# Altium PCB LacewingPXE_v3p1.PcbDoc (part 1 of 2)
Units mm, origin at the board's own origin, x right, y up, seen from the top; angles counter-clockwise.
Board outline 62.74 x 108.59 mm, 2 copper layers (Top Layer, Bottom Layer); 114 components, 91 nets, 535 pads, 84 vias.
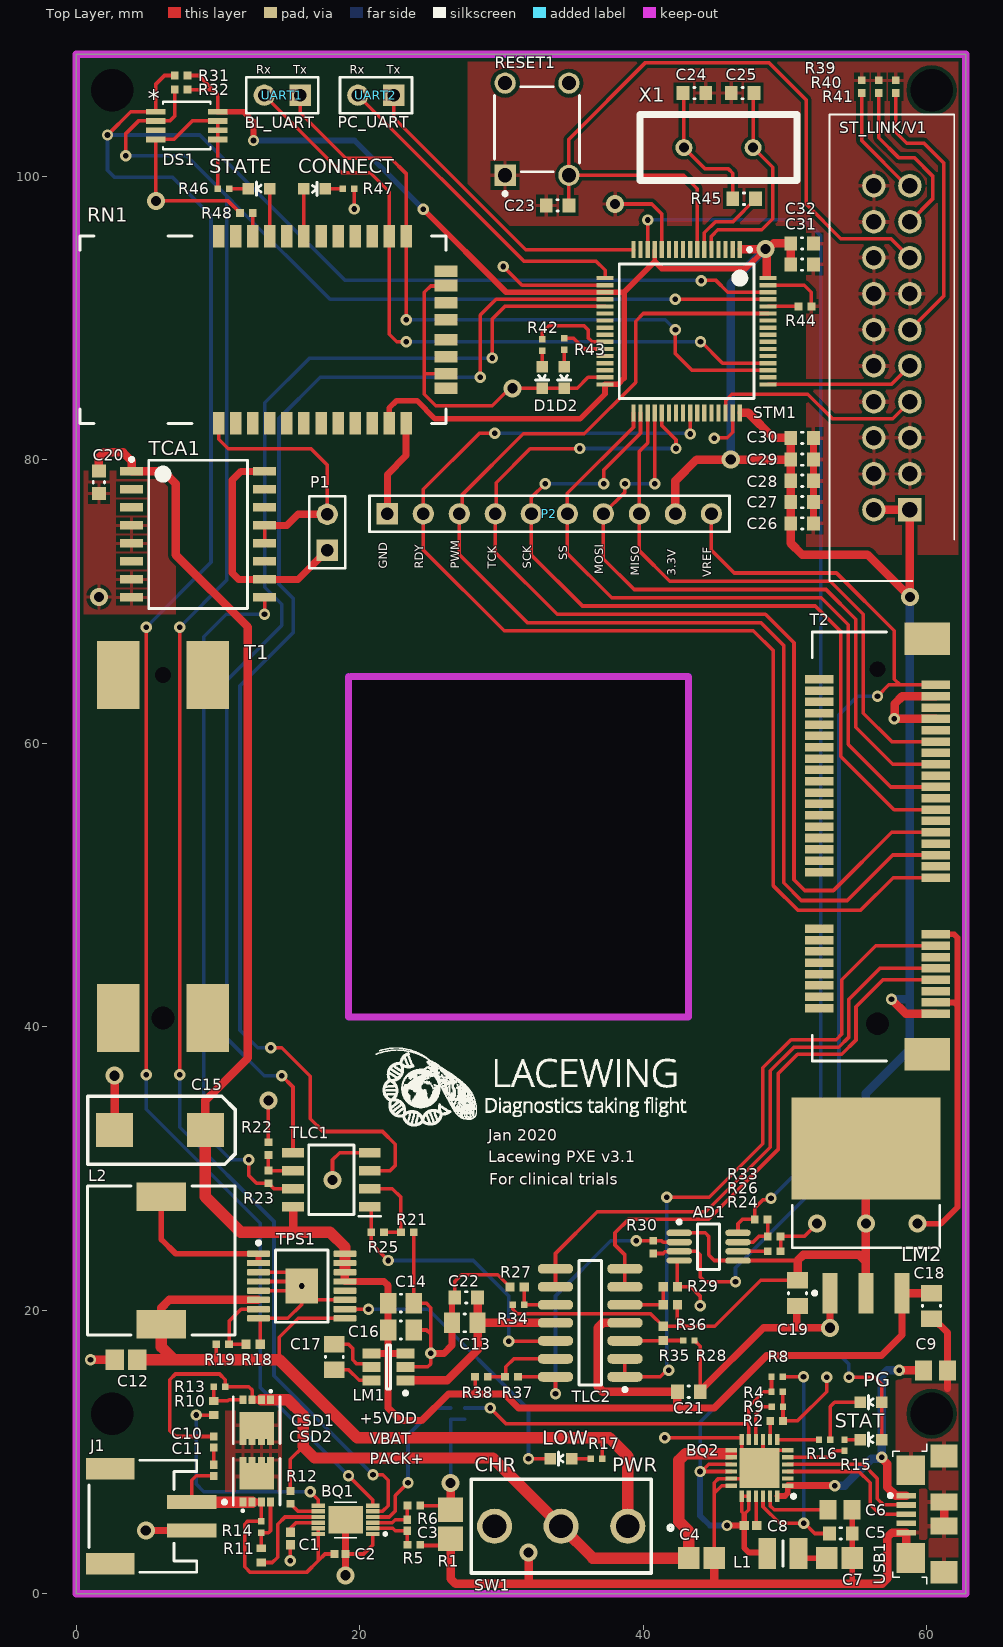
[diagram p0: Top Layer view]
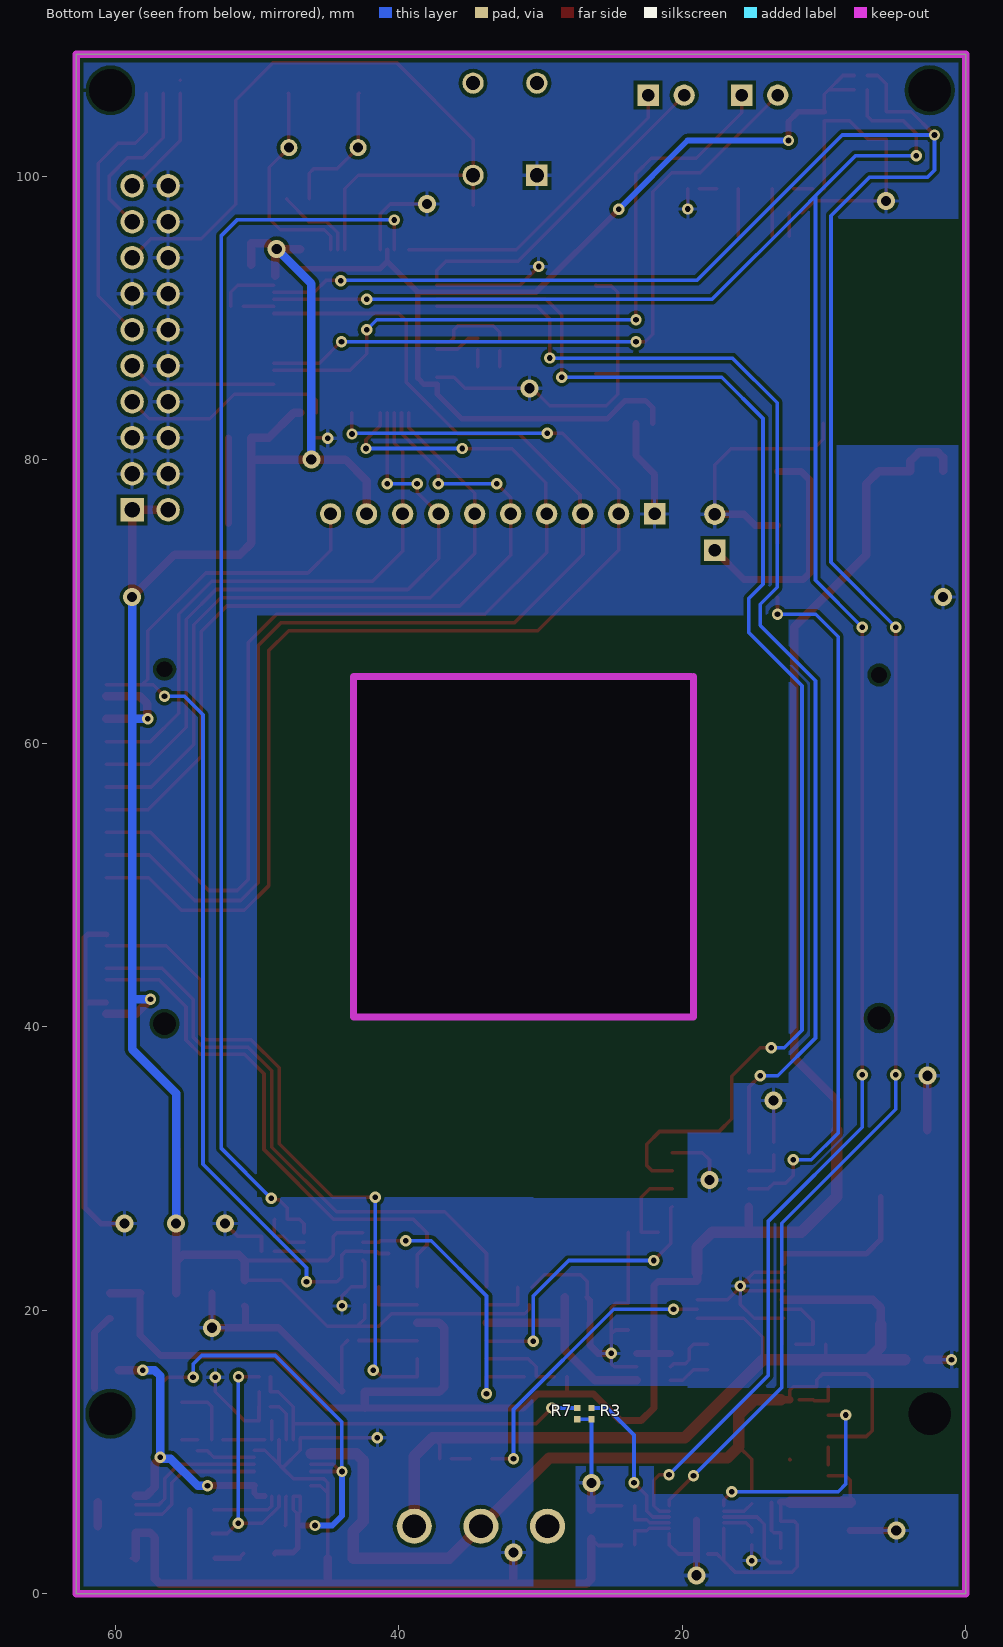
[diagram p1: Bottom Layer view, seen from below]

## Layer stack, top to bottom
Top Solder: solder mask 0.0102, Solder Resist, Dk 3.5
Top Layer: signal copper 0.0356
Dielectric 1: dielectric 0.32, FR-4, Dk 4.8
Bottom Layer: signal copper 0.0356
Bottom Solder: solder mask 0.0102, Solder Resist, Dk 3.5

## Board outline
0,0 62.738,0 62.738,108.585 0,108.585
cut-out: 43.188,40.672 19.188,40.672 19.188,64.705 43.188,64.705

## Design rules (kind name [scope] priority, off if disabled: settings)
Clearance [All] p1: gap=0.254 ignorepadtopadclearanceinfootprint=TRUE except(0: Arc-Hole Track-Hole SMDPad-Hole THPad-Hole Via-Hole Fill-Hole Poly-Hole Region-Hole Text-Hole; 0.1: Arc-SMDPad Track-SMDPad SMDPad-SMDPad; 0.127: Arc-Arc Arc-Track Track-Track)
ComponentClearance [All] p1 off: gap=0.254 collisioncheckmode=3 verticalgap=0.254 showdistances=FALSE
HoleSize [All] p1: absolutevalues=TRUE maxlimit=3 minlimit=0.025 maxpercent=80.000 minpercent=20.000
MinimumSolderMaskSliver [All] p1: minsoldermaskwidth=0.1
PolygonConnect [All] p1: connectstyle=Relief reliefconductorwidth=0.254 reliefentries=4 polygonreliefangle="90 Angle" airgapwidth=0.254
RoutingVias [All] p1: holewidth=0.711 width=1.27 viastyle="Through Hole" minholewidth=0.4 minwidth=0.8 maxholewidth=0.711 maxwidth=1.27
SilkToSilkClearance [All] p1: silktosilkclearance=0.1
SilkToSolderMaskClearance [IsPad] p1: minsilkscreentomaskgap=0.1 clearancetoexposedcopper=TRUE
SolderMaskExpansion [All] p1: expansion=0.102 istentingtop=FALSE
Width Width_PACK+ [InNet('PACK+')] p1: maxlimit=1 minlimit=0.254 preferedwidth=0.6 minimp=50.000000 maximp=50.000000 favimp=50.000000
Width Width_BAT+ [InNet('BAT+')] p2: maxlimit=1 minlimit=0.254 preferedwidth=0.6 minimp=50.000000 maximp=50.000000 favimp=50.000000
Width Width_+5VDD [InNet('+5VDD')] p3: maxlimit=1 minlimit=0.254 preferedwidth=0.6 minimp=50.000000 maximp=50.000000 favimp=50.000000
Width Width_-5VDD [InNet('-5VDD')] p4: maxlimit=1 minlimit=0.5 preferedwidth=0.6 minimp=50.000000 maximp=50.000000 favimp=50.000000
Width Width_VLi [InNet('VLiPo')] p5: maxlimit=1 minlimit=0.5 preferedwidth=1 minimp=50.000000 maximp=50.000000 favimp=50.000000
Width Width_VPelt [InNet('Vpeltier')] p6: maxlimit=1 minlimit=0.5 preferedwidth=1 minimp=50.000000 maximp=50.000000 favimp=50.000000
Width Width_5VUSB [InNet('5VUSB')] p7: maxlimit=1 minlimit=0.5 preferedwidth=0.6 minimp=50.000000 maximp=50.000000 favimp=50.000000
Width Width_VBAT [InNet('VBAT')] p8: maxlimit=1 minlimit=0.254 preferedwidth=0.6 minimp=50.000000 maximp=50.000000 favimp=50.000000
Width Width_3VDD [InNet('3.3VDD')] p9: maxlimit=0.6 minlimit=0.254 preferedwidth=0.6 minimp=50.000000 maximp=50.000000 favimp=50.000000
Width [All] p10: maxlimit=0.6 minlimit=0.254 preferedwidth=0.254 minimp=50.000000 maximp=50.000000 favimp=50.000000
25 further rules are at their usual default settings.

## Components (designator, comment, footprint, x,y, rotation, side; value= is the part's Value field where it differs from the comment)
AD1 "AD8237ARMZ" ADI-RM-8_N 44.599,24.475 r0 top
BQ1 "BQ27750DRZT" BQ27510DRZT 19,5.213 r90 top
BQ2 "BQ25606RGET" QFN50P400X400X100-25N 48.188,8.872 r180 top
C1 "2.2uF" CAPC1005X55X25NL05T10 15.1,3.9 r90 top
C2 "0.1uF" CAPC1005X56X25LL10T15 18.6,2.8 r180 top
C3 "0.1uF" CAPC1005X56X25LL10T15 23.35,4.825 r90 top
C4 "10uF" CAPC2013X140X50ML20T25 44.105,2.511 r0 top
C5 "4.7µF" CAPC0603(1608)100_N 53.928,4.25 r180 top
C6 "10uF" CAPC2013X95X45NL10T25 53.878,5.925 r180 top
C7 "10uF" CAPC2013X140X50ML20T25 53.828,2.511 r180 top
C8 "47nF" CAPC1005X55X25NL05T10 47.558,4.811 r180 top
C9 "1uF" CAPC2013X95X45NL10T25 60.6,15.752 r180 top
C10 "0.1uF" CAPC1005X56X25LL10T15 9.7,10.7 r270 top
C11 "0.1uF" CAPC1005X56X25LL10T15 9.7,8.7 r90 top
C12 "10uF" CAPC2013X140X50NL20T25 3.5,16.5 r0 top
C13 "10uF" CAPC0805(2012)75_N 27.4,19.1 r180 top
C14 "2.2uF" CAPC0805(2012)75_N 22.9,20.5 r180 top
C15 "220uF" AVX-CAPC7343_V 5.9,32.7 r180 top
C16 "2.2uF" CAPC0805(2012)75_N 22.9,18.6 r180 top
C17 "10uF" CAPC0805(2012)75_N 18.2,16.7 r270 top
C18 "10uF" CAPC0805(2012)75_N 60.325,20.3 r270 top
C19 "10uF" CAPC0805(2012)75_N 50.872,21.2 r270 top
C20 "0.1uF" CAPC0603(1608)100_N 1.6,78.4 r270 top
C21 "0.1uF" CAPC0603(1608)100_N 43.205,14.241 r0 top
C22 "0.1uF" CAPC0603(1608)100_N 27.5,20.9 r180 top
C23 "0.1uF" CAPC0603(1608)100_N 33.95,97.927 r180 top
C24 "18pF" CAPC0603(1608)100_N 43.6,105.85 r0 top
C25 "18pF" CAPC0603(1608)100_N 47,105.85 r180 top
C26 "4.7uF" CAPC0603(1608)100_N 51.2,75.494 r0 top
C27 "0.1uF" CAPC0603(1608)100_N 51.2,77 r0 top
C28 "0.1uF" CAPC0603(1608)100_N 51.2,78.5 r0 top
C29 "0.1uF" CAPC0603(1608)100_N 51.2,80 r0 top
C30 "0.1uF" CAPC0603(1608)100_N 51.2,81.53 r0 top
C31 "1uF" CAPC0603(1608)100_N 51.193,93.747 r0 top
C32 "10nF" CAPC0603(1608)100_N 51.193,95.247 r0 top
CONNECT "Green" LED-0603 16.8,99.1 r270 top
CSD1 "CSD17575Q3" CSD16327 12.725,12.245 r180 top
CSD2 "CSD17575Q3" CSD16327 12.725,7.896 r0 top
D1 "Green" LED-0603 32.863,85.788 r180 top
D2 "Red" LED-0603 34.418,85.788 r180 top
DS1 "DS7505U+" 21-0036K 7.8,103.559 r0 top
J1 "" "JST- S2B-PH-SM4-TB(LF)(SN)-2_V" 4.699,5.461 r270 top
L1 "1uH" INDC2520X120N 49.838,2.836 r0 top
L2 "15uH" "WE-PD 1050" 6,23.5 r90 top
LM1 "LM2776DBVT" TI-DBV6_M 22.023,16 r180 top
LM2 "LM1086CS-3.3/NOPB" KTT0003B_N 55.7,27.4 r90 top
LOW "Red" LED-0603 34.2,9.518 r90 top
P1 "" HDR1X2 17.7,73.6 r90 top
P2 "" HDR1X10 21.94,76.172 r0 top
PG "Yellow" LED-0603 56.06,13.5 r90 top
R1 "0.001" RESC3216X89X104LL25T25 26.4,4.9 r90 top
R2 "165" RESC1005X40X25NL05T05 49.4,12.19 r180 top
R3 "10K" RESC1005X40X25LL05T05 26.4,12.7 r90 bottom
R4 "30.1K" RESC1005X40X25LL05T05 49.438,14.247 r180 top
R5 "100" RESC1005X40X25NL05T05 23.805,3.46 r180 top
R6 "100" RESC1005X40X25NL05T05 23.805,6.213 r180 top
R7 "10K" RESC1005X40X25LL05T05 27.4,12.7 r270 bottom
R8 "5.23K" RESC1005X40X25LL05T05 49.438,15.3 r0 top
R9 "340" RESC1005X40X25LL05T05 49.449,13.193 r180 top
R10 "5.1K" RESC0402(1005)_N 9.7,13.1 r90 top
R11 "5.1K" RESC0402(1005)_N 13.05,2.7 r90 top
R12 "10" RESC1005X40X25NL05T05 15.1,6.8 r90 top
R13 "10M" RESC1005X40X25LL05T05 10.1,14.6 r0 top
R14 "10M" RESC1005X40X25LL05T05 13.05,4.7 r90 top
R15 "470" RESC1005X40X25LL05T05 54.188,10.472 r90 top
R16 "470" RESC1005X40X25LL05T05 52.788,10.872 r0 top
R17 "470" RESC1005X40X25LL05T05 36.7,9.518 r180 top
R18 "68K" RESC1005X40X25ML05T05 12.47,17.6 r180 top
R19 "330K" RESC1005X40X25NL05T05 10.325,17.6 r0 top
R21 "20k" RESC1005X40X25NL05T05 23.348,25.5 r180 top
R22 "20k" RESC1005X40X25NL05T05 13.551,31.4 r270 top
R23 "10k" RESC1005X40X25NL05T05 13.551,29.4 r270 top
R24 "1k" RESC1005X40X25NL05T05 49.226,24.15 r180 top
R25 "10k" RESC1005X40X25NL05T05 21.25,25.5 r180 top
R26 "1k" RESC1005X40X25NL05T05 49.226,25.2 r180 top
R27 "24k" RESC1005X40X25ML05T05 31.1,21.625 r0 top
R28 "30k" RESC1005X40X25LL05T05 43.205,17.861 r180 top
R29 "51k" RESC1005X40X25ML05T05 41.9,21.65 r180 top
R30 "10k" RESC1005X40X25NL05T05 40.7,24.45 r90 top
R31 "10k" RESC1005X40X25NL05T05 7.4,107.092 r0 top
R32 "10K" RESC1005X40X25NL05T05 7.4,106.092 r0 top
R33 "1M" RESC1005X40X25NL05T05 48.3,26.4 r180 top
R34 "75k" RESC1005X40X25LL05T05 31.188,20.38 r180 top
R35 "51k" RESC1005X40X25ML05T05 41.4,18.361 r90 top
R36 "51k" RESC1005X40X25ML05T05 41.905,20.38 r0 top
R37 "20k" RESC1005X40X25NL05T05 30.7,15.3 r0 top
R38 "20k" RESC1005X40X25NL05T05 28.578,15.3 r0 top
R39 "10k" RESC1005X40X25NL05T05 55.4,106.3 r270 top
R40 "10k" RESC1005X40X25NL05T05 56.6,106.3 r270 top
R41 "10k" RESC1005X40X25NL05T05 57.8,106.3 r270 top
R42 "470" RESC1005X40X25LL05T05 32.863,88.081 r90 top
R43 "470" RESC1005X40X25LL05T05 34.418,88.142 r90 top
R44 "10k" RESC1005X40X25NL05T05 51.4,90.8 r180 top
R45 "0" RESC0603(1608)_N 47.1,98.4 r0 top
R46 "470" RESC1005X40X25LL05T05 10.384,99.1 r0 top
R47 "470" RESC1005X40X25LL05T05 19.2,99.1 r180 top
R48 "10k" RESC1005X40X25NL05T05 12,97.4 r0 top
RESET1 "Button" OMRON-B3F-1000-4_V 32.5,103.3 r90 top
RN1 "RN41" RN41 18.071,89.154 r0 top
ST_LINK/V1 "JTAG Programmer" JTAG2 58.801,76.454 r90 top
STAT "Green" LED-0603 56.06,10.872 r90 top
STATE "Red" LED-0603 12.9,99.1 r90 top
STM1 "STM32F303RET6" STM-LQFP64_V 43.05,89.05 r270 top
SW1 "SPDT" 1000-SERIES(SPDT) 34.2,4.761 r90 top
T1 "Mini PCIe Latch" "Molex Latch-48099" 6.115,52.705 r90 top
T2 "Mini PCIe connector" "Molex Conn-67910" 56.515,52.705 r90 top
TCA1 "TCA0372DWG" ONSC-SOIC-16-751G-03_V 8.59,74.725 r0 top
TLC1 "TLC2272AID" SOIC127P600X175-8N 18,29.2 r180 top
TLC2 "TLC2274IDR" TI-D14_M 36.25,19.11 r180 top
TPS1 "TPS61032PWPR" PW0016A_M 15.9,21.7 r0 top
UART1 "BL_UART" HDR1X2 15.8,105.7 r180 top
UART2 "PC_UART" HDR1X2 22.4,105.7 r180 top
USB1 "Micro-USB" HIRO-ZX62R-B-5P_V 59.876,5.611 r90 top
X1 "8MHz" QCL 45.3,102 r180 top

## Footprints (in the part's own frame and the unit in brackets; to place one, negate y for a bottom-side part, rotate by r counter-clockwise, add the part's x,y. Pads: shape width x height; smd on the part's side, far side on the other; paste and mask are expansions set on the pad)
21-0036K [mil]
  rect 54x16 smd paste+0 mask+0: 1(-86,38.39) 2(-86,12.8) 3(-86,-12.8) 4(-86,-38.39) 5(86,-38.39) 6(86,-12.8) 7(86,12.8) 8(86,38.39)
  silkscreen extent -66,-66 66,66, body extent 0,0 10,10, height 10
1000-SERIES(SPDT) [mm]
  round 2.48 hole 1.68: 1(0,-4.7) 2(0,0) 3(0,4.7)
  silkscreen extent -3.3,-7.88 3.3,6.35
ADI-RM-8_N [mm] "SOP, 8-Leads, Body 3x3mm, Pitch 0.65mm, IPC Medium Density"
  oval 1.8x0.45 smd: 1(-2.075,0.975) 2(-2.075,0.325) 3(-2.075,-0.325) 4(-2.075,-0.975) 5(2.075,-0.975) 6(2.075,-0.325) 7(2.075,0.325) 8(2.075,0.975)
  silkscreen extent -2.2,-1.6 0.77,1.87, body extent -1.6,-1.6 1.6,1.6, height 1.1
AVX-CAPC7343_V [mm] "SMT Capacitor, 2 Leads, Body 7.3x4.3mm"
  rect 2.6x2.4 smd: 1(-3.202,0.007) 2(3.198,0.007)
  silkscreen extent -5.33,-2.39 5.08,2.41, body extent -3.49,-2.03 3.51,2.04, height 4.05
BQ27510DRZT [mm]
  rect 0.3x0.95 smd: 1(-1,-1.925) 2(-0.6,-1.925) 3(-0.2,-1.925) 4(0.2,-1.925) 5(0.6,-1.925) 6(1,-1.925) 7(1,1.925) 8(0.6,1.925) 9(0.2,1.925) 10(-0.2,1.925) 11(-0.6,1.925) 12(-1,1.925)
  rect 1.95x2.45 smd: 13(0,0)
  silkscreen extent -1.25,-2.9 1.25,0.8
CAPC0603(1608)100_N [mm] "Chip Capacitor, Body 1.6x0.8mm, Height 1.0mm, IPC Medium Density"
  rect 0.9x1 smd: 1(-0.8,0) 2(0.8,0)
  silkscreen extent -0.05,-0.4 0.05,0.4, body extent -0.87,-0.48 0.88,0.47, height 1
CAPC0805(2012)75_N [mm] "Chip Capacitor, Body 2.0x1.2mm, Height 0.75mm, IPC Medium Density"
  rect 1.15x1.45 smd: 1(-0.9,0) 2(0.9,0)
  silkscreen extent -0.05,-0.62 0.05,0.63, body extent -1.1,-0.72 1.1,0.73, height 0.75
CAPC1005X55X25NL05T10 [mm] "Chip Capacitor, 2-Leads, Body 1.05x0.55mm, IPC Medium Density"
  rect 0.66x0.62 smd: 1(-0.44,0) 2(0.44,0)
  body extent -0.53,-0.28 0.53,0.28, height 0.55
CAPC1005X56X25LL10T15 [mm] "Chip Capacitor, 2-Leads, Body 1.00x0.50mm, IPC High Density"
  rect 0.58x0.54 smd: 1(-0.39,0) 2(0.39,0)
  body extent -0.55,-0.3 0.55,0.3, height 0.56
CAPC2013X95X45NL10T25 [mm] "Chip Capacitor, 2-Leads, Body 2.00x1.25mm, IPC Medium Density"
  rect 1.2x1.4 smd: 1(-0.85,0) 2(0.85,0)
  body extent -1.05,-0.67 1.05,0.67, height 0.95
CAPC2013X140X50ML20T25 [mm] "Chip Capacitor, 2-Leads, Body 2.00x1.25mm, IPC Low Density"
  rect 1.5x1.55 smd: 1(-0.9,0) 2(0.9,0)
  body extent -1.1,-0.72 1.1,0.72, height 1.4
CAPC2013X140X50NL20T25 [mm] "Chip Capacitor, 2-Leads, Body 2.00x1.25mm, IPC Medium Density"
  rect 1.3x1.45 smd: 1(-0.8,0) 2(0.8,0)
  body extent -1.1,-0.72 1.1,0.72, height 1.4
CSD16327 [mm] "CSD17575Q3"
  rect 0.5x0.63 smd: 1(-0.975,-1.435) 2(-0.325,-1.435) 3(0.325,-1.435) 4(0.975,-1.435)
  rect 0.5x0.41 smd: 5(0.975,1.545) 6(0.325,1.545) 7(-0.325,1.545) 8(-0.975,1.545)
  rect 2.45x1.9 smd: 9(0,0.39)
  silkscreen extent -1.65,-2.08 1.65,1.65
HDR1X2 [mm] "Connector; Header; 2 Position"
  rect 1.5x1.5 hole 0.9: 1(0,0)
  round 1.5 hole 0.9: 2(2.54,0)
  silkscreen extent -1.27,-1.27 3.81,1.27
HDR1X10 [mm] "Connector; Header; 10 Position"
  rect 1.5x1.5 hole 0.9: 1(0,0)
  round 1.5 hole 0.9: 2(2.54,0) 3(5.08,0) 4(7.62,0) 5(10.16,0) 6(12.7,0) 7(15.24,0) 8(17.78,0) 9(20.32,0) 10(22.86,0)
  silkscreen extent -1.27,-1.27 24.13,1.27
HIRO-ZX62R-B-5P_V [mm] "USB Micro-B R/A Connector"
  rect 0.4x1.35 smd: 1(1.3,1.338) 2(0.65,1.338) 3(0,1.338) 4(-0.65,1.338) 5(-1.3,1.338)
  rect 2.1x2 smd: 6(-3.1,1.012) 11(3.1,1.012)
  rect 1.6x1.9 smd: 7(-4.1,-1.338) 10(4.1,-1.338)
  rect 1.2x1.9 smd: 8(-0.85,-1.338) 9(0.85,-1.338)
  silkscreen extent -4.95,-0.13 4.95,2.58, body extent -4.4,-3.95 4.4,1.78, height 2.71
INDC2520X120N [mm]
  rect 1.25x2.2 smd: 1(-1.1,0) 2(1.1,0)
  silkscreen extent 0,-0.9 0,0.9, body extent -1.25,-1 1.25,1, height 1.2
"JST- S2B-PH-SM4-TB(LF)(SN)-2_V" [mm] "SMD, 2-Leads, Body 7.9x7.6mm, Pitch 2mm"
  rect 1x3.5 smd: 1(-1,3.45) 2(1,3.45)
  rect 1.5x3.4 smd: MP1(-3.35,-2.3) MP2(3.35,-2.3)
  silkscreen extent -3.95,-3.8 3.95,5.88, body extent -3.95,-3.8 3.95,4.8, height 5.6
JTAG2 [mm] "Header, Vertical Shrouded, 100 mil pitch; 25 mil lead width, 20 pins, 2 rows, 10 pins per row, 1295 mil L X 346 mil W X 346 mil H body"
  rect 1.652x1.652 hole 1.101 paste-1.652: 1(0,0)
  round 1.652 hole 1.101 paste-1.652: 2(0,2.54) 3(2.54,0) 4(2.54,2.54) 5(5.08,0) 6(5.08,2.54) 7(7.62,0) 8(7.62,2.54) 9(10.16,0) 10(10.16,2.54) 11(12.7,0) 12(12.7,2.54) 13(15.24,0) 14(15.24,2.54) 15(17.78,0) 16(17.78,2.54) 17(20.32,0) 18(20.32,2.54) 19(22.86,0) 20(22.86,2.54)
  silkscreen extent -5.02,-3.12 27.88,5.66, body extent -3.18,-3.56 26.04,5.92, height 8.89
KTT0003B_N [mm] "D2-PAK, 3-Leads, Body 10.41x8.89mm, Pitch 2.54mm, IPC Medium Density"
  rect 2.85x1.05 smd: 1(-6.2,2.54) 2(-6.2,0) 3(-6.2,-2.54)
  rect 7.2x10.5 smd: 4(4,0)
  silkscreen extent -6.32,-5.2 0,5.2, body extent -6.78,-5.2 7.57,5.2, height 4.64
LED-0603 [mil] "LED-0603"
  rect 32x32 smd: A(0,-29.53) C(0,30)
  silkscreen extent -18,-6 19,7
"Molex Conn-67910" [mm] "Board-to-Board Connector, SMT, Right Angle, Pitch 0.8mm, 52-Position, Female"
  rect 0.6x2 smd: 1(-11.8,-4.1) 2(-11.4,4.1) 3(-11,-4.1) 4(-10.6,4.1) 5(-10.2,-4.1) 6(-9.8,4.1) 7(-9.4,-4.1) 8(-9,4.1) 9(-8.6,-4.1) 10(-8.2,4.1) 11(-7.8,-4.1) 12(-7.4,4.1) 13(-7,-4.1) 14(-6.6,4.1) 15(-6.2,-4.1) 16(-5.8,4.1) 17(-2.2,-4.1) 18(-1.8,4.1) 19(-1.4,-4.1) 20(-1,4.1) 21(-0.6,-4.1) 22(-0.2,4.1) 23(0.2,-4.1) 24(0.6,4.1) 25(1,-4.1) 26(1.4,4.1) 27(1.8,-4.1) 28(2.2,4.1) 29(2.6,-4.1) 30(3,4.1) 31(3.4,-4.1) 32(3.8,4.1) 33(4.2,-4.1) 34(4.6,4.1) 35(5,-4.1) 36(5.4,4.1) 37(5.8,-4.1) 38(6.2,4.1) 39(6.6,-4.1) 40(7,4.1) 41(7.4,-4.1) 42(7.8,4.1) 43(8.2,-4.1) 44(8.6,4.1) 45(9,-4.1) 46(9.4,4.1) 47(9.8,-4.1) 48(10.2,4.1) 49(10.6,-4.1) 50(11,4.1) 51(11.4,-4.1) 52(11.8,4.1)
  round 1.3 hole 1.6 unplated: MH1(-12.5,0)
  round 0.8 hole 1.1 unplated: MH2(12.5,0)
  rect 2.3x3.2 smd: MP1C(-14.65,-3.5) MP2C(14.65,-3.5)
  silkscreen extent -15.12,-0.64 15.12,4.6, body extent -15,-5 15,4.5, height 5.6
"Molex Latch-48099" [mm]
  round 1.3 hole 1.6 unplated: MH3(-12.1,0)
  round 0.8 hole 1.1 unplated: MH4(12.1,0)
  rect 4.8x3 smd: MP1L(-12.1,3.15) MP2L(-12.1,-3.15) MP3L(12.1,3.15) MP4L(12.1,-3.15)
OMRON-B3F-1000-4_V [mm] "TH, 4-Leads, Body 6x6mm"
  rect 1.5x1.5 hole 1 paste+0: 1(-3.25,2.25)
  round 1.5 hole 1 paste+0: 2(3.25,2.25) 3(-3.25,-2.25) 4(3.25,-2.25)
  silkscreen extent -4.67,-3 3,3, body extent -3,-3 3,3, height 4.5
ONSC-SOIC-16-751G-03_V [mm] "SOIC, 16-Leads, Body 10.45x7.6mm, Pitch 1.27mm"
  rect 1.62x0.58 smd: 1(-4.69,4.445) 2(-4.69,3.175) 3(-4.69,1.905) 4(-4.69,0.635) 5(-4.69,-0.635) 6(-4.69,-1.905) 7(-4.69,-3.175) 8(-4.69,-4.445) 9(4.69,-4.445) 10(4.69,-3.175) 11(4.69,-1.905) 12(4.69,-0.635) 13(4.69,0.635) 14(4.69,1.905) 15(4.69,3.175) 16(4.69,4.445)
  silkscreen extent -4.81,-5.23 3.48,5.41, body extent -3.8,-5.23 3.8,5.23, height 2.65
PW0016A_M [mm] "SOP, 16-Leads, Body 5.1x4.5mm, Pitch 0.65mm, IPC Low Density"
  rrect22% 1.6x0.45 smd: 1(-3.05,2.275) 2(-3.05,1.625) 3(-3.05,0.975) 4(-3.05,0.325) 5(-3.05,-0.325) 6(-3.05,-0.975) 7(-3.05,-1.625) 8(-3.05,-2.275) 9(3.05,-2.275) 10(3.05,-1.625) 11(3.05,-0.975) 12(3.05,-0.325) 13(3.05,0.325) 14(3.05,0.975) 15(3.05,1.625) 16(3.05,2.275)
  rect 2.31x2.46 smd: PowerPAD(0,0)
  silkscreen extent -3.17,-2.55 1.85,3.17, body extent -3.21,-2.5 3.21,2.5, height 1
QCL [mm]
  round 1.2 hole 0.7: 1(-2.44,0) 2(2.44,0)
  silkscreen extent -5.53,-2.32 5.53,2.32
QFN50P400X400X100-25N [mm]
  rect 0.8x0.3 smd: 1(-2,1.25) 2(-2,0.75) 3(-2,0.25) 4(-2,-0.25) 5(-2,-0.75) 6(-2,-1.25) 13(2,-1.25) 14(2,-0.75) 15(2,-0.25) 16(2,0.25) 17(2,0.75) 18(2,1.25)
  rect 0.3x0.8 smd: 7(-1.25,-2) 8(-0.75,-2) 9(-0.25,-2) 10(0.25,-2) 11(0.75,-2) 12(1.25,-2) 19(1.25,2) 20(0.75,2) 21(0.25,2) 22(-0.25,2) 23(-0.75,2) 24(-1.25,2)
  rect 2.8x2.8 smd: 25(0,0)
  silkscreen extent -2.53,1.88 -2.28,2.12, body extent -2.05,-2.05 2.05,2.05, height 1
RESC0402(1005)_N [mm] "Chip Resistor, Body 1.0x0.5mm, IPC Medium Density"
  rect 0.55x0.65 smd: 1(-0.5,0) 2(0.5,0)
  body extent -0.52,-0.27 0.53,0.28, height 0.4
RESC0603(1608)_N [mm] "Chip Resistor, Body 1.6x0.8mm, IPC Medium Density"
  rect 0.9x1 smd: 1(-0.8,0) 2(0.8,0)
  silkscreen extent -0.05,-0.4 0.05,0.4, body extent -0.85,-0.47 0.85,0.47, height 0.6
RESC1005X40X25LL05T05 [mm] "Chip Resistor, 2-Leads, Body 1.00x0.50mm, IPC High Density"
  rect 0.45x0.45 smd: 1(-0.4,0) 2(0.4,0)
  body extent -0.53,-0.27 0.53,0.28, height 0.4
RESC1005X40X25ML05T05 [mm] "Chip Resistor, 2-Leads, Body 1.00x0.50mm, IPC Low Density"
  rect 0.65x0.65 smd: 1(-0.5,0) 2(0.5,0)
  body extent -0.53,-0.27 0.53,0.28, height 0.4
RESC1005X40X25NL05T05 [mm] "Chip Resistor, 2-Leads, Body 1.00x0.50mm, IPC Medium Density"
  rect 0.55x0.55 smd: 1(-0.45,0) 2(0.45,0)
  body extent -0.53,-0.27 0.53,0.28, height 0.4
RESC3216X89X104LL25T25 [mm] "Chip Resistor, 2-Leads, Body 3.45x1.85mm, IPC High Density"
  rect 1.7x1.75 smd: 1(-1.025,0) 2(1.025,0)
  body extent -1.73,-0.92 1.73,0.92, height 0.89
RN41 [mil]
  rect 32x63 smd: 1(-315.42,-259.92) 2(-268.18,-259.92) 3(-220.93,-259.92) 4(-173.69,-259.92) 5(-126.44,-259.92) 6(-79.2,-259.92) 7(-31.58,-259.92) 8(15.42,-259.92) 9(63.42,-259.92) 10(110.42,-259.92) 11(157.42,-259.92) 12(204.42,-259.92) 13(204.42,259.92) 14(157.42,259.92) 15(110.42,259.92) 16(63.42,259.92) 17(15.42,259.92) 18(-31.58,259.92) 19(-79.2,259.92) 20(-126.44,259.92) 21(-173.69,259.92) 22(-220.93,259.92) 23(-268.18,259.92) 24(-315.42,259.92)
  rect 63x32 smd: 28(315.42,122.92) 29(315.42,-122.13) 30(315.42,162.92) 31(315.42,74.92) 32(315.42,27.92) 33(315.42,-27.64) 34(315.42,-74.88) 35(315.42,-162.37)
  silkscreen extent -701,-260 315,260
SOIC127P600X175-8N [mm]
  rect 1.525x0.65 smd: 1(-2.712,1.905) 2(-2.712,0.635) 3(-2.712,-0.635) 4(-2.712,-1.905) 5(2.712,-1.905) 6(2.712,-0.635) 7(2.712,0.635) 8(2.712,1.905)
  silkscreen extent -3.47,-2.45 1.6,2.58, body extent -3,-2.45 3,2.45, height 1.75
STM-LQFP64_V [mm] "Thin QFP, 64-Leads, Body 10x10mm, Pitch 0.5mm, ST Recommended"
  rect 1.2x0.3 smd: 1(-5.75,3.75) 2(-5.75,3.25) 3(-5.75,2.75) 4(-5.75,2.25) 5(-5.75,1.75) 6(-5.75,1.25) 7(-5.75,0.75) 8(-5.75,0.25) 9(-5.75,-0.25) 10(-5.75,-0.75) 11(-5.75,-1.25) 12(-5.75,-1.75) 13(-5.75,-2.25) 14(-5.75,-2.75) 15(-5.75,-3.25) 16(-5.75,-3.75) 33(5.75,-3.75) 34(5.75,-3.25) 35(5.75,-2.75) 36(5.75,-2.25) 37(5.75,-1.75) 38(5.75,-1.25) 39(5.75,-0.75) 40(5.75,-0.25) 41(5.75,0.25) 42(5.75,0.75) 43(5.75,1.25) 44(5.75,1.75) 45(5.75,2.25) 46(5.75,2.75) 47(5.75,3.25) 48(5.75,3.75)
  rect 0.3x1.2 smd: 17(-3.75,-5.75) 18(-3.25,-5.75) 19(-2.75,-5.75) 20(-2.25,-5.75) 21(-1.75,-5.75) 22(-1.25,-5.75) 23(-0.75,-5.75) 24(-0.25,-5.75) 25(0.25,-5.75) 26(0.75,-5.75) 27(1.25,-5.75) 28(1.75,-5.75) 29(2.25,-5.75) 30(2.75,-5.75) 31(3.25,-5.75) 32(3.75,-5.75) 49(3.75,5.75) 50(3.25,5.75) 51(2.75,5.75) 52(2.25,5.75) 53(1.75,5.75) 54(1.25,5.75) 55(0.75,5.75) 56(0.25,5.75) 57(-0.25,5.75) 58(-0.75,5.75) 59(-1.25,5.75) 60(-1.75,5.75) 61(-2.25,5.75) 62(-2.75,5.75) 63(-3.25,5.75) 64(-3.75,5.75)
  silkscreen extent -5.87,-4.75 4.75,4.75, body extent -5,-5 5,5, height 1.6
TI-D14_M [mm] "SOIC, 14-Leads, Body 8.65x3.9mm, Pitch 1.27mm, IPC Low Density"
  oval 2.5x0.7 smd: 1(-2.45,3.81) 2(-2.45,2.54) 3(-2.45,1.27) 4(-2.45,0) 5(-2.45,-1.27) 6(-2.45,-2.54) 7(-2.45,-3.81) 8(2.45,-3.81) 9(2.45,-2.54) 10(2.45,-1.27) 11(2.45,0) 12(2.45,1.27) 13(2.45,2.54) 14(2.45,3.81)
  silkscreen extent -2.58,-4.4 0.8,4.83, body extent -2,-4.38 2,4.38, height 1.75
TI-DBV6_M [mm] "SOT-23, 6-Leads, Body 2.90x1.60mm, Pitch 0.95mm, IPC Low Density"
  rect 1.3x0.7 smd: 1(-1.2,0.95) 2(-1.2,0) 3(-1.2,-0.95) 4(1.2,-0.95) 5(1.2,0) 6(1.2,0.95)
  silkscreen extent -1.33,-1.55 0.15,1.97, body extent -0.87,-1.52 0.87,1.53, height 1.45
"WE-PD 1050" [mm] "SMD Inductor, 2-Leads, Body 10,0x10,0mm"
  rect 2x3.5 smd: 1(-4.5,0) 2(4.5,0)
  silkscreen extent -5.25,-5.2 5.25,5.2, body extent -5,-5 5,5, height 4.75

## Part data
AD1: library part AD8237, "Instrument Amplifier", Manufacturer="ANALOG DEVICES", Farnell Order Code=2213571, Part No=AD8237ARMZ
BQ1: "Fuel Gauge and Protection", Manufacturer="TEXAS INSTRUMENTS", Farnell Order Code=2773561, Part No=BQ27750DRZT
BQ2: "Battery Charger", Manufacturer="TEXAS INSTRUMENTS", Farnell Order Code=3008740, Part No=BQ25606RGET
C1: library part CMP-2008-04630-4, "CAP 0402", Manufacturer=MURATA, Part No=GRM155R60J225ME15D, Farnell Order Code=2362088
C2 C3 C10 C11: library part CMP-2008-02743-1, "CAP 0402", Manufacturer=AVX, Part No=04026D104KAT2A, Farnell Order Code=1327657
C4 C7: library part CMP-2007-04702-1, "CAP 0805", Manufacturer=AVX, Part No=0805ZC106KAT2A, Farnell Order Code=2094042
C5: library part CAP, "CAP 0603", Manufacturer=MURATA, Part No=GRM188R61C475KAAJD, Farnell Order Code=2611924
C6: library part CMP-2007-00191-1, "CAP 0805", Manufacturer=MURATA, Part No=GRM21BC71E106KE11L, Farnell Order Code=2611935
C8: library part CMP-2008-04630-4, "CAP 0402", Manufacturer=AVX, Part No=0402YD473KAT2A, Farnell Order Code=2332545
C9: library part CMP-2007-00191-1, "CAP 0805", Manufacturer=AVX, Part No=08053C105JAT2A, Farnell Order Code=2332736
C12: library part CMP-2007-04643-1, "CAP 0805", Manufacturer=AVX, Part No=08056D106KAT2A, Farnell Order Code=1301818
C13 C17 C18 C19: library part CMP-1036-00002-1, "CAP 0805", Manufacturer="WURTH ELEKTRONIK", Part No=885012107010, Farnell Order Code=2533951
C14 C16: library part CMP-1036-00002-1, "CAP 0805", Manufacturer=MULTICOMP, Part No=MC0805B225K250CT, Farnell Order Code=2320829
C15: library part CMP-0279-00002-1, "CAP 2917", Manufacturer=AVX, Part No=TAJD227K010RNJ, Farnell Order Code=197191
C20 C21 C22 C23 C27 C28 C29 C30: library part CMP-1035-00032-1, "CAP 0603", Manufacturer=MULTICOMP, Part No=MC0603B104K500CT, Farnell Order Code=1759122
C24 C25: library part CMP-1035-00032-1, "CAP 0603", Manufacturer=KEMET, Part No=C0603C180K5RACTU, Farnell Order Code=2821151
C26: library part CMP-1035-00032-1, "CAP 0603", Manufacturer=AVX, Part No=06036D475KAT2A, Farnell Order Code=1833803
C31: library part CMP-1035-00032-1, "CAP 0603", Manufacturer=AVX, Part No=06033D105KAT2A, Farnell Order Code=1658868
C32: library part CMP-1035-00032-1, "CAP 0603", Manufacturer=KEMET, Part No=C0603C103K5RAC7081, Farnell Order Code=2522596
CONNECT D1 STAT: library part LED0603, "LED SMD 0603", Manufacturer=KINGBRIGHT, Part No=KPT-1608SGC, Farnell Order Code=2099223
CSD1 CSD2: "MOSFET", Manufacturer="TEXAS INSTRUMENTS", Part No=CSD17575Q3T, Farnell Order Code=3009654
D2 LOW STATE: library part LED0603, "LED SMD 0603", Manufacturer=KINGBRIGHT, Part No=KPT-1608SECK-J3, Farnell Order Code=2335810
DS1: library part ds7505u+, "Digital Thermometer", Manufacturer=MAXIM, Farnell Order Code=2519297, Part No=DS7505U+
J1: library part CN-1P-2M-R2, "Battery Connector", Manufacturer=JST, Part No=S2B-PH-SM4-TB(LF)(SN), Farnell Order Code=9492615
L1: library part DFE252012F-1R0M=P2, "Inductor", Manufacturer=MURATA, Part No=DFE252012F-1R0M=P2, Farnell Order Code=2871454
L2: library part CMP-1396-00032-1, "Power Inductor", Manufacturer="WURTH ELEKTRONIK", Part No=7447714150, Farnell Order Code=2082678
LM1: library part LM2776, "Voltage Inverter -5V", Manufacturer="TEXAS INSTRUMENTS", Farnell Order Code=2498456, Part No=LM2776DBVT
LM2: library part CMP-0062-00552-5, "1.5A 3.3V LDO", Manufacturer="TEXAS INSTRUMENTS", Farnell Order Code=3121994, Part No=LM1086CS-3.3/NOPB
P1 UART1 UART2: library part "Header 2", "Header, 2-Pin"
  UART1 UART2: LatestRevisionDate=17-Jul-2002, LatestRevisionNote="Re-released for DXP Platform.", Publisher="Altium Limited"
P2: library part "Header 10", "Header, 10-Pin"
PG: library part LED0603, "LED SMD 0603", Manufacturer=KINGBRIGHT, Part No=KPT-1608SYCK-J3, Farnell Order Code=2335795
R1: library part CMP-1666-00018-2, "RES 1206", Manufacturer=VISHAY, Part No=WSLP12061L000FEA, Farnell Order Code=2420760
R2: library part CMP-2002-08233-1, "RES 0402", Manufacturer=VISHAY, Part No=CRCW0402165RFKED, Farnell Order Code=1150910
R3 R7: library part CMP-2002-01179-1, "Thermistor RES 0402", Manufacturer=PANASONIC, Part No=ERTJ0EG103FA, Farnell Order Code=1892596
R4: library part CMP-2002-08506-3, "RES 0402", Manufacturer=VISHAY, Part No=CRCW040230K1FKED, Farnell Order Code=1469704
R5 R6: library part CMP-2002-08127-1, "RES 0402", Manufacturer=VISHAY, Part No=CRCW0402100RFKED, Farnell Order Code=1469672
R8: library part CMP-2002-00118-3, "RES 0402", Manufacturer=VISHAY, Part No=CRCW04025K23FKED, Farnell Order Code=2140832
R9: library part CMP-2002-00876-1, "RES 0402", Manufacturer=PANASONIC, Part No=ERJ2RKF3400X, Farnell Order Code=2302582
R10 R11: library part CMP-1011-00590-1, "RES 0402", Manufacturer=VISHAY, Part No=CRCW04025K10FKED, Farnell Order Code=2140831
R12: library part CMP-2002-08143-1, "RES 0402", Manufacturer=VISHAY, Part No=CRCW040210R0FKED, Farnell Order Code=1652742
R13 R14: library part CMP-2002-08141-1, "RES 0402", Manufacturer=VISHAY, Part No=CRCW040210M0FKED, Farnell Order Code=1469670
R15 R16 R17 R42 R43 R46 R47: library part CMP-2002-00022-1, "RES 0402", Manufacturer=VISHAY, Part No=CRCW0402470RFKED, Farnell Order Code=2140742
R18: library part CMP-2002-00170-1, "RES 0402", Manufacturer=VISHAY, Part No=CRCW040268K0FKED, Farnell Order Code=2140918
R19: library part CMP-2002-08521-1, "RES 0402", Manufacturer=VISHAY, Part No=CRCW0402330KFKED, Farnell Order Code=2140980
R21 R22 R37 R38: library part CMP-2002-08356-1, "RES 0402", Manufacturer=VISHAY, Part No=CRCW040220K0FKED, Farnell Order Code=1469693
R23 R25 R30 R31 R32 R39 R40 R41 R44 R48: library part CMP-2002-08135-1, "RES 0402", Manufacturer=VISHAY, Part No=CRCW040210K0FKED, Farnell Order Code=1469669
R24 R26: library part CMP-2002-08276-1, "RES 0402", Manufacturer=VISHAY, Part No=CRCW04021K00FKED, Farnell Order Code=1469662
R27: library part CMP-2002-08403-1, "RES 0402", Manufacturer=VISHAY, Part No=CRCW040224K0FKED, Farnell Order Code=2140882
R28: library part CMP-2002-08504-1, "RES 0402", Manufacturer=VISHAY, Part No=CRCW040230K0FKED, Farnell Order Code=2140891
R29 R35 R36: library part CMP-2002-00078-1, "RES 0402", Manufacturer=VISHAY, Part No=CRCW040251K0FKED, Farnell Order Code=2140909
R33: library part CMP-2002-08314-1, "RES 0402", Manufacturer=VISHAY, Part No=CRCW04021M00FKED, Farnell Order Code=1469667
R34: library part CMP-2002-00208-1, "RES 0402", Manufacturer=VISHAY, Part No=CRCW040275K0FKED, Farnell Order Code=1469732
R45: library part CMP-1012-00514-1, "RES 0603", Manufacturer=MULTICOMP, Part No=MC0603SAF0000T5E, Farnell Order Code=2309111
RESET1: library part SW-SPST-4_A, Manufacturer=OMRON, Part No=B3F-1022, Farnell Order Code=1829495
RN1: library part BLUETOOTH-RN41, "RN41 Bluetooth Module", Manufacturer=MICROCHIP, Part No=RN41-I/RM, Farnell Order Code=2143311
ST_LINK/V1: library part JTAG, Manufacturer=AMPHENOL, Part No=T821120A1S100CEU, Farnell Order Code=2215309
STM1: library part STM32F303RBT6_1, "ARM Cortex-M4 32-bit MCU", Manufacturer=STMICROELECTRONICS, Part No=STM32F303RBT6, Farnell Order Code=2333255
SW1: library part 1101M1S3ZQE2, Manufacturer="C & K COMPONENTS", Farnell Order Code=1437714, Part No=1101M1S3ZQE2
T1: Manufacturer=MOLEX, Part No=48099-5701, Mouser Order Code=538-48099-5701
T2: "Mini PCIe Connector", Manufacturer=MOLEX, Part No=67910-5700, Mouser Order Code=538-67910-5700
TCA1: library part TCA0372, "Dual High-Power OPAMP", Manufacturer="ON SEMICONDUCTOR", Farnell Order Code=1468783, Part No=TCA0372DWG
TLC1: "Dual OPAMP", Manufacturer="TEXAS INSTRUMENTS", Farnell Order Code=3005164, Part No=TLC2272AID
TLC2: library part TLC2274, "Quad OPAMP", Manufacturer="TEXAS INSTRUMENTS", Farnell Order Code=3117878, Part No=TLC2274IDR
TPS1: library part TPS61032, "Voltage Boost +5V", Manufacturer="TEXAS INSTRUMENTS", Farnell Order Code=1207333, Part No=TPS61032PWPR
USB1: library part CMP-0031-00001-1, "ZX62R-B-5P", Manufacturer=HIROSE, Part No=ZX62R-B-5P(30), Farnell Order Code=2554983
X1: library part XTAL, "Crystal Oscillator", Manufacturer=QANTEK, Part No=QCL8.00000F18B23B, Farnell Order Code=2508448

## Free pads (board coordinates)
  round 1.524 hole 3 unplated: MH3(2.54,12.7) MH3(2.54,106.045) MH3(60.325,12.7) MH3(60.325,106.045)

## Via types
v1: diameter 0.8, hole 0.4, Top Layer to Bottom Layer, 66 vias
v2: diameter 1.27, hole 0.711, Top Layer to Bottom Layer, 18 vias

## Nets (pads, with @x,y where several pads share a name; then routed paths per layer and width w, separated by ;. In a path a pad name is that pad's centre, name@x,y a point inside that pad or via, vN(x,y) a via of type N, cw(c..) or ccw(c..) an arc to the next point about the centre after c; other vN are vias at no path point)
3.3VDD: AD1.1 AD1.5 C19.1 C26.1 C27.1 C28.1 C29.1 C30.1 C31.1 C32.1 DS1.8 LM2.2 LM2.4 P2.9 R31.2 R32.2 R34.2 R35.2 R36.2 RN1.11 ST_LINK/V1.1 ST_LINK/V1.2 STM1.1 STM1.13 STM1.19 STM1.32 STM1.48 STM1.64 T2.1 T2.45 T2.49 | length 252.4
  Top Layer w0.254: R32.2@7.85,106.092 9.659,106.092 ; R31.2@7.85,107.092 8.659,107.092 9.659,106.092 ; DS1.8@9.984,104.534 9.984,105.767 9.659,106.092 ; R34.2@30.788,20.38 30.788,20.075 31.108,19.755 40.505,19.755 R35.2@41.4,18.861 42.939,18.861 ; R36.2@42.405,20.38 42.4,20.375 42.4,19.4 42.939,18.861 ; AD1.1@42.524,25.45 44.355,25.45 44.605,25.2 44.605,23.896 45,23.5 50.872,23.5 ; C19.1@50.872,22.1 48.271,22.1 45.032,18.861 42.939,18.861
  Top Layer w0.3: 40.8,93.957 STM1.13@40.8,94.8
  Top Layer w0.4: DS1.8@9.984,104.534 9.988,104.531 11.811,104.531 12.5,103.842 v1(12.5,102.5) ; RN1.11@22.069,82.552 22.069,83.625 22.6,84.156 24.021,84.156 25.31,82.867 35.525,82.867 37.288,84.63 37.288,85.288 STM1.32@37.3,85.3 38.2,85.3 38.643,85.743 38.643,91.8 ; v1(24.48,97.646) 30.326,91.8 STM1.19@37.3,91.8 38.643,91.8 ; v2@48.576,94.824 47.217,93.464 41.294,93.464 40.8,93.957 38.643,91.8
  Top Layer w0.6: P2.9@42.26,76.172 42.26,78.509 43.751,80 v2(46.163,80) C29.1@50.4,80 ; 46.95,83.304 47.4,83.304 49.174,81.53 C30.1@50.4,81.53 C29.1@50.4,80 ; 46.95,94.824 48.576,94.824 v2(48.6,94.847) ; 48.7,92.95 48.7,94.747 v2(48.6,94.847) ; C31.1@50.393,93.747 C32.1@50.393,95.247 49.181,95.247 48.781,94.847 v2(48.6,94.847) ; C19.1@50.872,22.1 50.872,23.5 51.272,23.9 55.209,23.9 55.7,23.409 ; LM2.2@55.7,21.2 55.7,23.409 ; LM2.4@55.7,31.4 v2(55.7,26.1) 55.7,23.409 ; ST_LINK/V1.2@56.261,76.454 ST_LINK/V1.1@58.801,76.454 v2(58.8,70.3) ; v1(57.5,41.924) 58.519,40.905 T2.1@60.615,40.905 ; v2(58.8,70.3) 55.8,73.3 51.197,73.3 50.4,74.097 C26.1@50.4,75.494 C27.1@50.4,77 C28.1@50.4,78.5 C29.1@50.4,80 ; T2.45@60.615,61.705 v1(57.7,61.705) 57.738,61.743 57.738,62.787 58.256,63.305 T2.49@60.615,63.305
  Bottom Layer w0.4: v1(12.5,102.5) 19.626,102.5 v1(24.48,97.646)
  Bottom Layer w0.6: v2(46.163,80) 46.163,92.41 v2(48.6,94.847) ; v2(55.7,26.1) 55.7,35.3 58.801,38.401 58.801,41.924 ; v1(57.5,41.924) 58.801,41.924 ; v1(57.7,61.705) 58.801,61.705 ; v2(58.8,70.3) 58.801,61.705 ; 58.801,41.924 58.801,61.705
+5VDD: C14.2 C15.1 C16.2 C18.1 C20.1 C21.1 LM1.3 LM1.4 LM2.3 R38.1 TCA1.1 TLC1.8 TLC2.4 TPS1.13 TPS1.14 TPS1.15 TPS1.16 | length 150.5
  Top Layer w0.254: 28.128,14.096 R38.1@28.128,15.3
  Top Layer w0.5: TPS1.13@18.95,22.025 21.707,22.025 22,21.732 C14.2@22,20.5 C16.2@22,18.6 22,16.95 ; LM1.4@20.823,16.95 22,16.95 ; LM1.3@23.223,16.95 22,16.95 ; LM2.3@58.24,21.2 58.24,18.24 56.8,16.8 48.7,16.8 45,13.1 42.404,13.1 31.2,13.1 30.204,14.096 28.128,14.096 26.249,14.096 24.356,12.203 22.897,12.203 22,13.1 22,16.95
  Top Layer w0.6: C20.1@1.6,79.2 1.6,80.149 1.951,80.5 3.3,80.5 3.9,79.9 TCA1.1@3.9,79.17 6.13,79.17 7,78.3 7,73.28 12.1,68.18 12.1,37.791 9.102,34.793 C15.1@9.102,32.693 ; 15.288,25.5 TLC1.8@15.288,27.295 ; TPS1.13@18.95,22.1 TPS1.14@18.95,22.675 ; TLC2.4@38.7,19.11 37.138,19.11 36.787,18.759 36.787,14.592 37.138,14.241 C21.1@42.405,14.241 42.404,13.1 ; LM2.3@58.24,21.2 C18.1@60.325,21.2
  Top Layer w0.8: C15.1@9.102,32.693 9.102,27.998 11.6,25.5 15.288,25.5 17.9,25.5 18.95,24.45 TPS1.16@18.95,23.975 TPS1.15@18.95,23.325 TPS1.14@18.95,22.675
-5VDD: C13.1 C22.1 LM1.1 TLC2.11 | length 15.2
  Top Layer w0.6: LM1.1@23.223,15.05 26.15,15.05 28.3,17.2 C13.1@28.3,19.1 ; C22.1@28.3,20.9 C13.1@28.3,19.1 ; TLC2.11@33.8,19.11 33.795,19.105 28.305,19.105 C13.1@28.3,19.1